# EAGLE board ChargerShieldExpA-Prod (EAGLE 6.5.0)
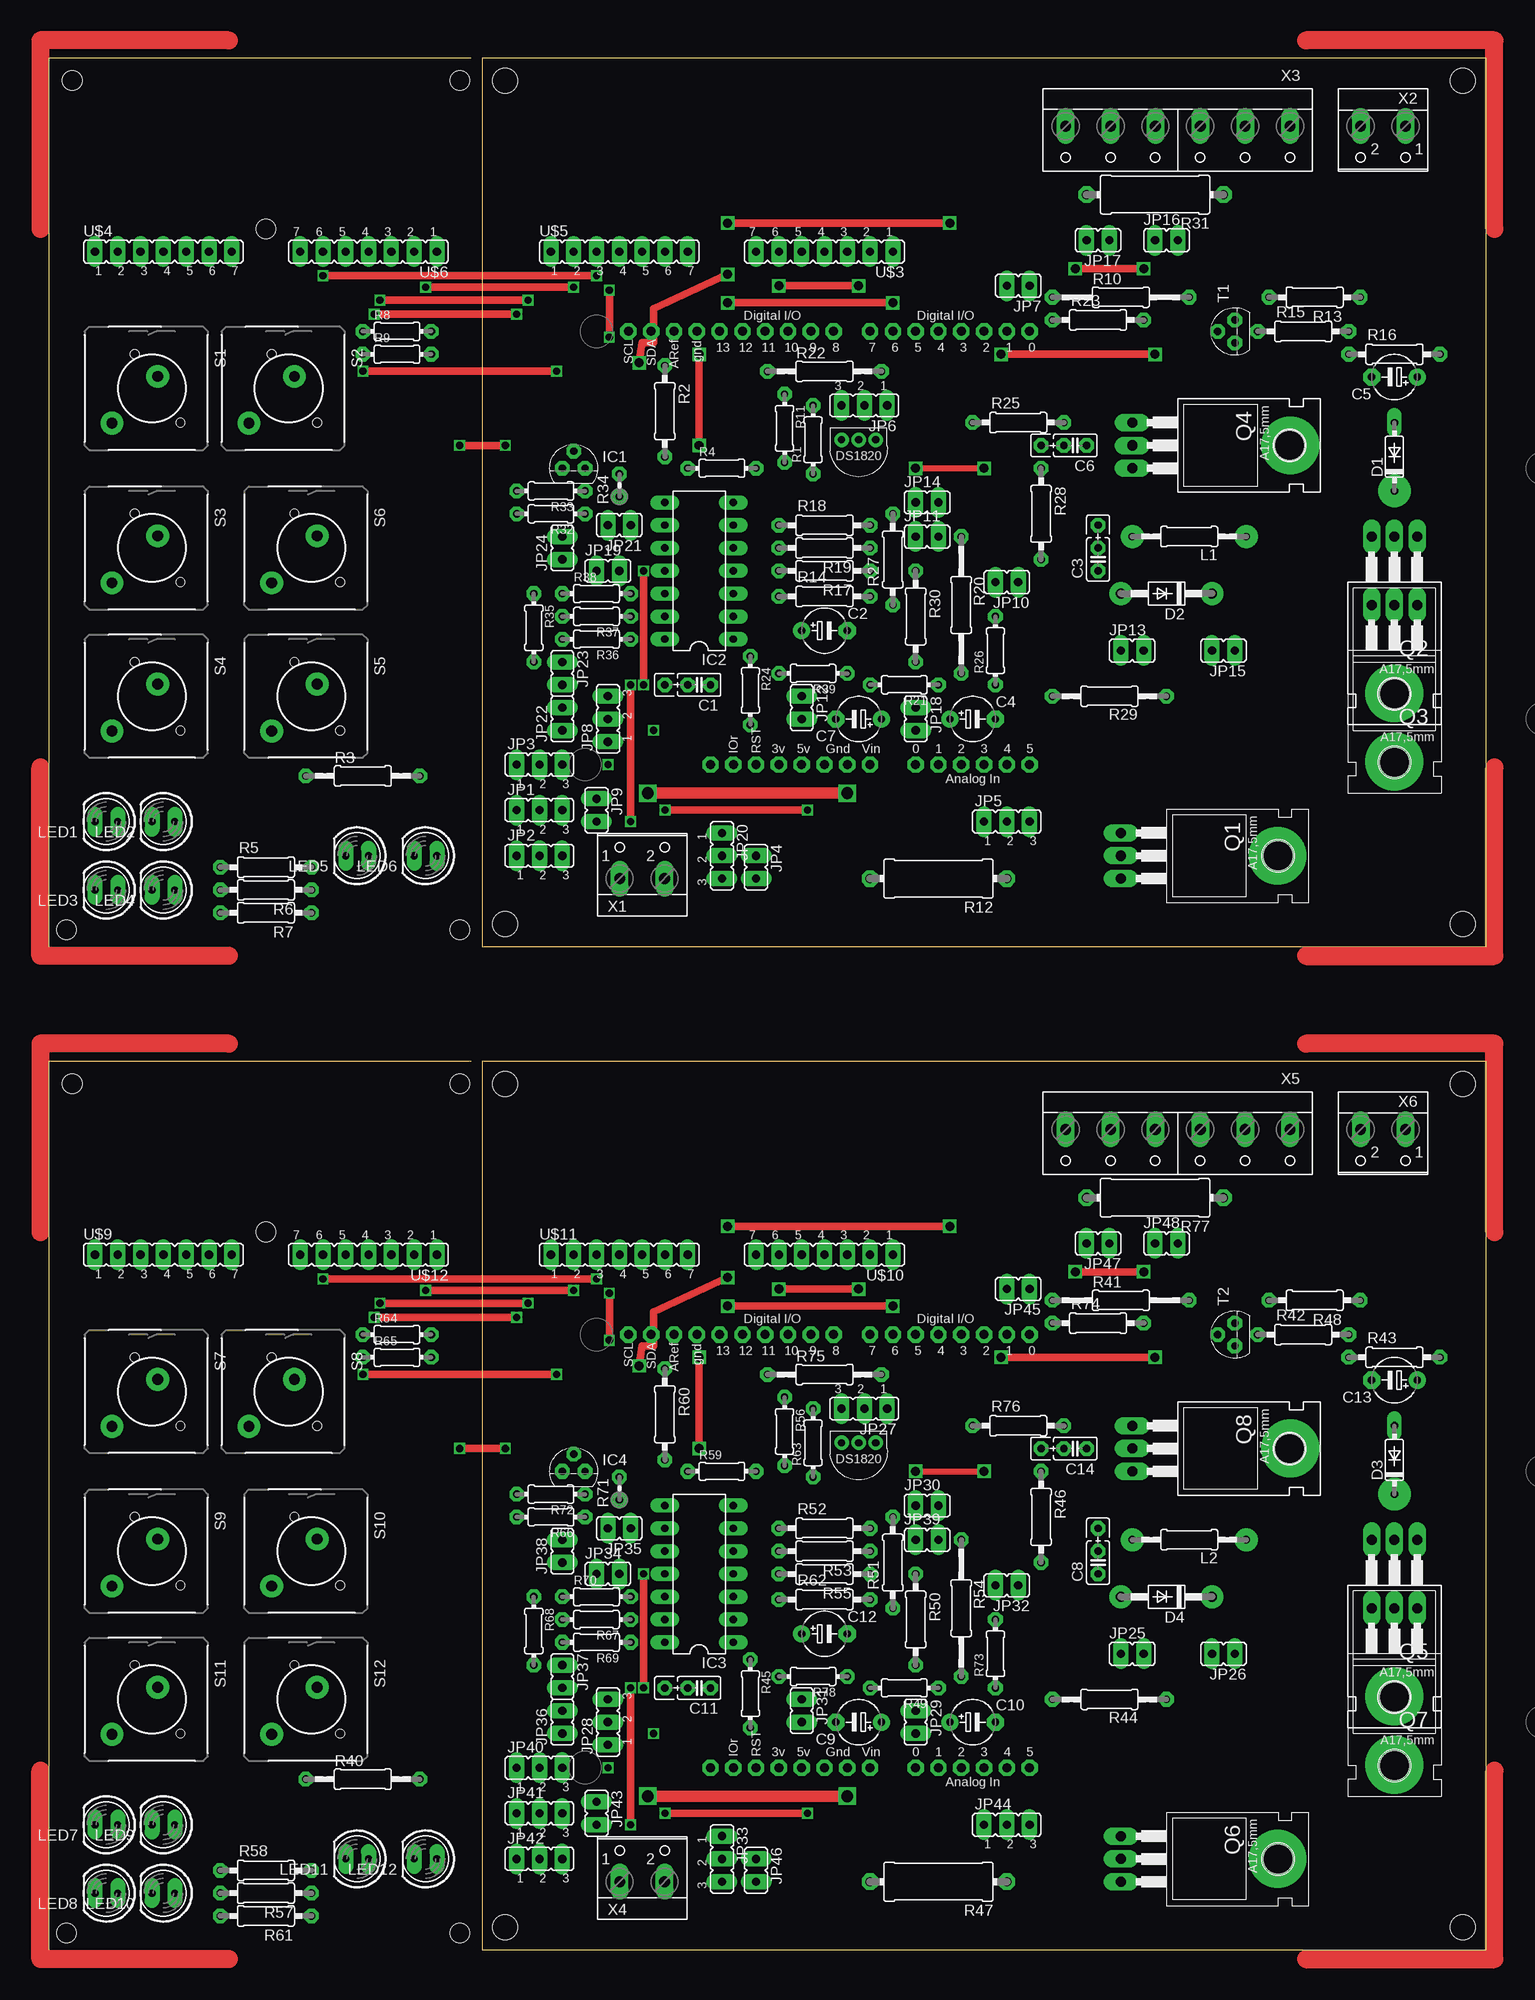
[diagram p0: board, top side]
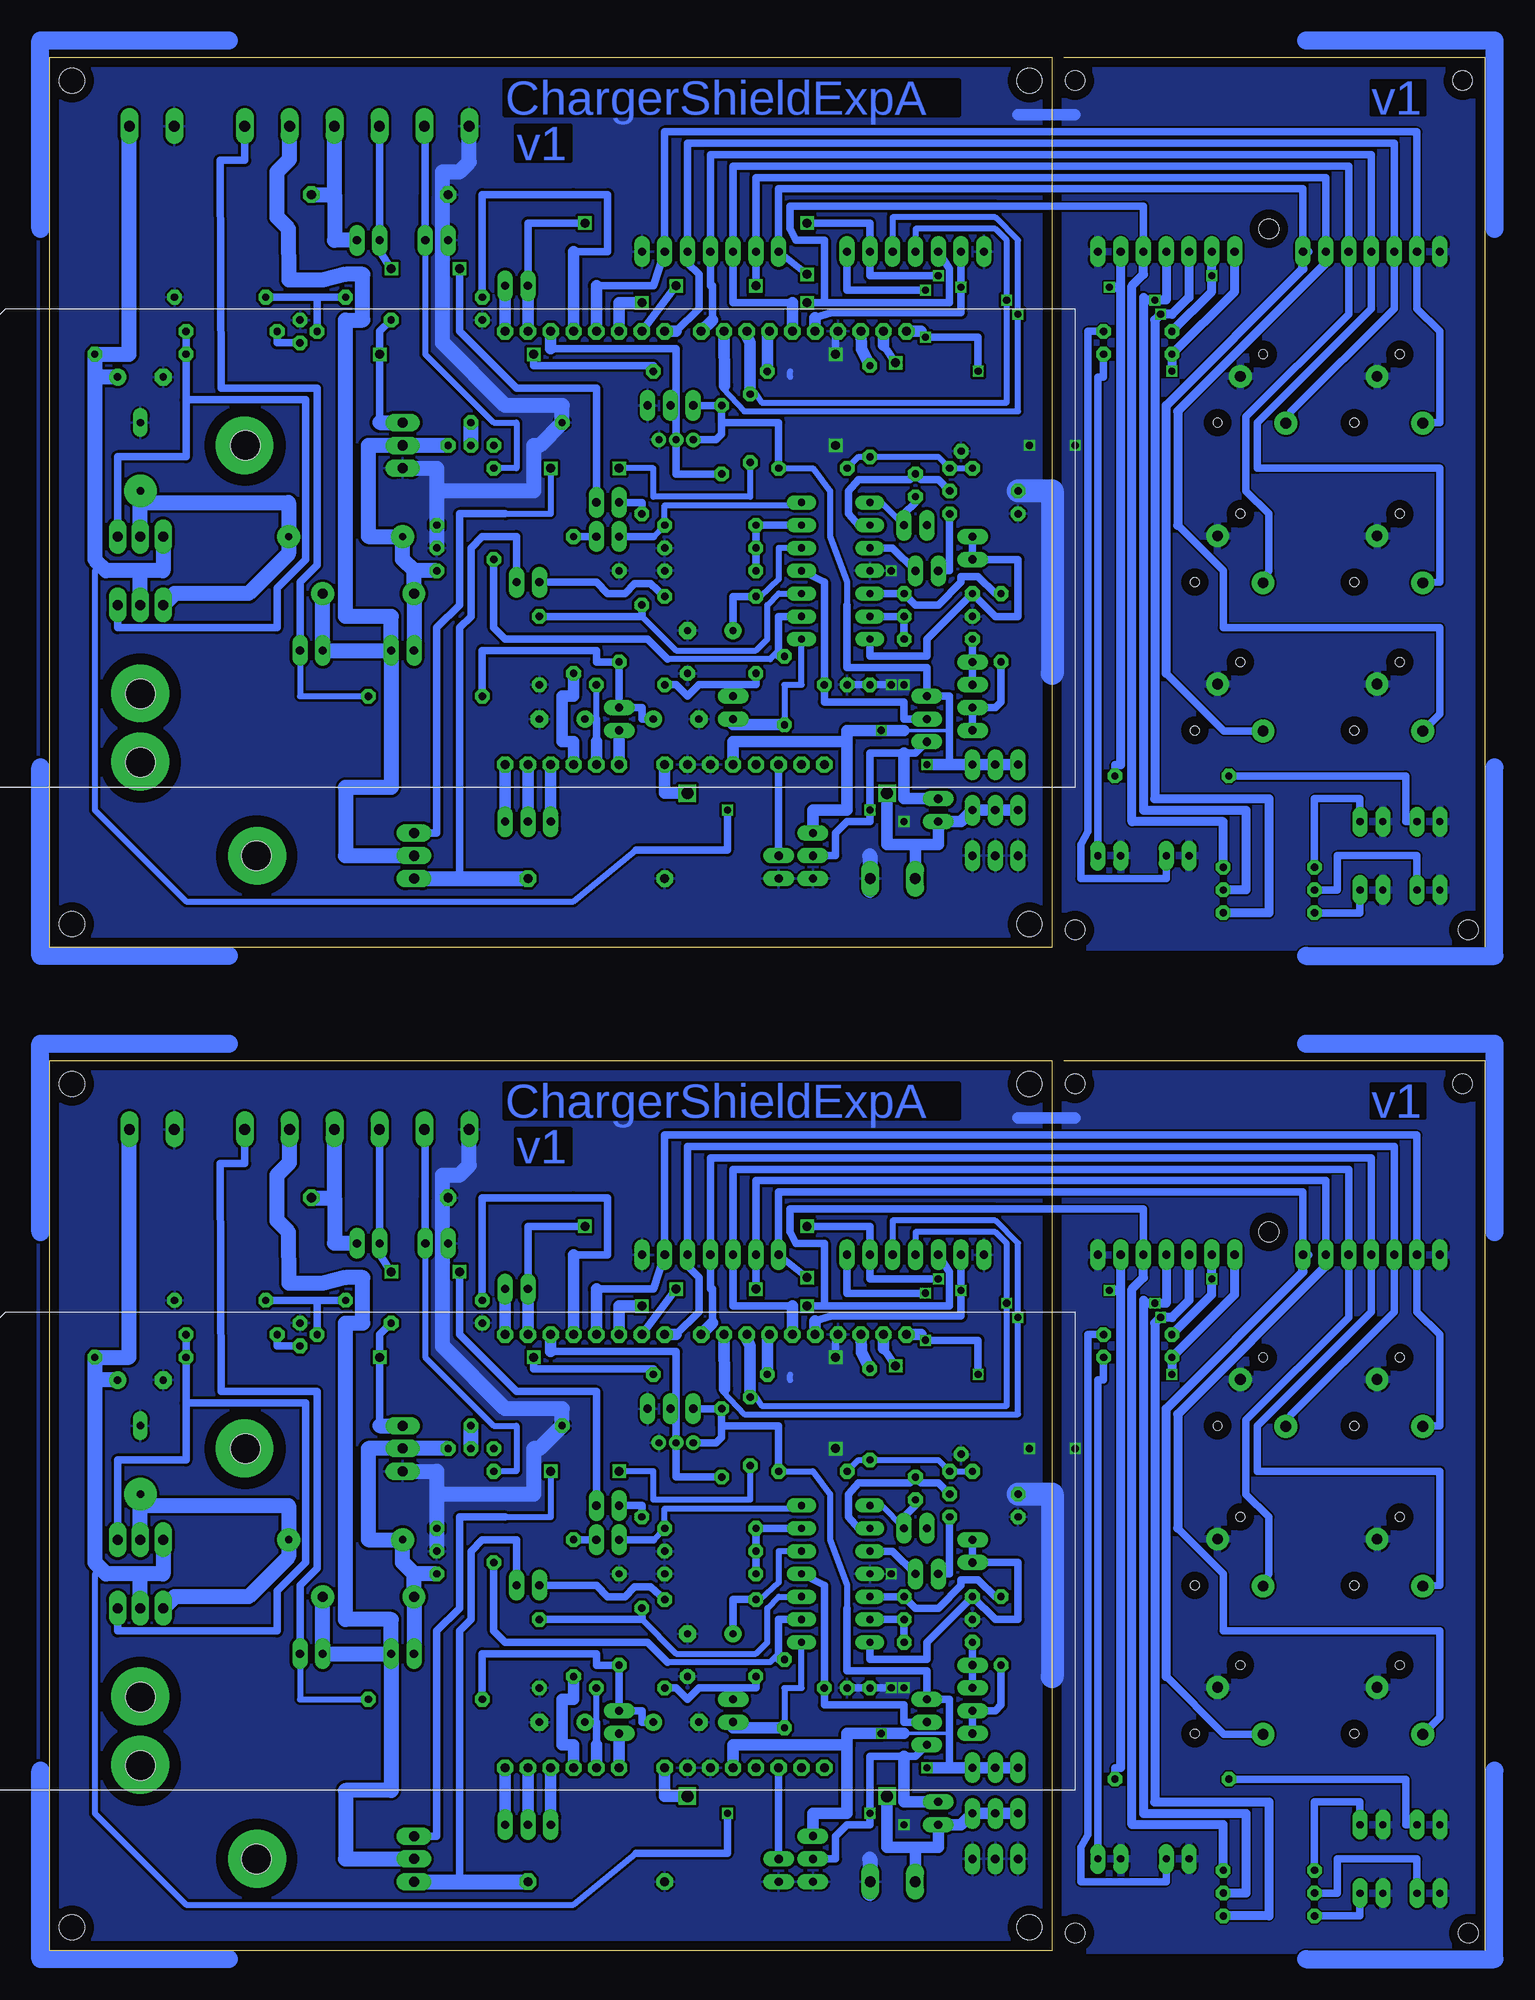
[diagram p1: board, bottom side, seen from below]

Size 160.02 x 210.82 mm. Coordinates in mm from the lower left corner, seen from the top.
Outline: 0,111.76 0,210.82 46.99,210.82
Outline: 0,0 0,99.06 46.99,99.06
Outline: 48.26,210.82 160.02,210.82 160.02,111.76 48.26,111.76 48.26,210.82
Outline: 48.26,99.06 160.02,99.06 160.02,0 48.26,0 48.26,99.06
Copper layers (1*16): Top 0.035mm / dielectric 1.5mm / Bottom 0.035mm
Design rules "charger": minimum track width 26mil, minimum drill 24mil, track to track 8mil, track to pad 8mil, pad to pad 8mil, via to via 8mil, smd to smd 8mil, copper to edge 40mil, drill to drill 8mil, minimum pad ring 16mil, minimum via ring 8mil, stop-mask expansion 4mil, vias tented up to drill 0mil, thermal gap 10mil
Holes 2.8 mm at 50.8,114.3 50.8,208.28 157.48,114.3 157.48,208.28 50.8,2.54 50.8,96.52 157.48,2.54 157.48,96.52
Holes 2.2 mm at 2.54,208.28 45.72,208.28 1.9,113.67 45.72,113.67 24.13,191.77 2.54,96.52 45.72,96.52 1.9,1.91 45.72,1.91 24.13,80.01

## Footprints (pad centres in the part's own frame; a part is rotated, then mirrored left to right if it is on the bottom)
C025_050-025X075 = drill 0.813 octagon: 1 -1.27,0; 2 1.27,0; 3 3.81,0
E5-5 = drill 0.813 pad 1.905: + -2.54,0 | drill 0.813 pad 1.905 octagon: - 2.54,0
DO35-7 = drill 0.813 long: A 3.81,0; C -3.81,0
DO41-10 = drill 1.118: A 5.08,0; C -5.08,0
TO92 = drill 0.813 octagon: 1 1.27,-1.27; 2 0,0.635; 3 -1.27,-1.27
DIL14 = drill 0.813 long: 1 -7.62,-3.81; 2 -5.08,-3.81; 3 -2.54,-3.81; 4 0,-3.81; 5 2.54,-3.81; 6 5.08,-3.81; 7 7.62,-3.81; 8 7.62,3.81; 9 5.08,3.81; 10 2.54,3.81; 11 0,3.81; 12 -2.54,3.81; 13 -5.08,3.81; 14 -7.62,3.81
JP2 = drill 0.914 long: 1 -2.54,0; 2 0,0; 3 2.54,0
JP1 = drill 0.914 long: 1 0,-1.27; 2 0,1.27
0207/12 = drill 0.813 octagon: 1 -6.35,0; 2 6.35,0
LED5MM_BIG = drill 0.8 pad 1.676 long: A -1.27,0; K 1.27,0
TO220 = drill 1.118 long: 1 -2.54,-6.35; 2 0,-6.35; 3 2.54,-6.35 | hole 3.302: 0,11.176
TO220BH = drill 1.118 long: D 0,-6.35; G -2.54,-6.35; S 2.54,-6.35 | hole 3.302: 0,11.176
0204/7 = drill 0.813 octagon: 1 -3.81,0; 2 3.81,0
0207/10 = drill 0.813 octagon: 1 -5.08,0; 2 5.08,0
0207/15 = drill 0.813 octagon: 1 -7.62,0; 2 7.62,0
0414/15 = drill 1.016 octagon: 1 -7.62,0; 2 7.62,0
0204V = drill 0.813 octagon: 1 -1.27,0; 2 1.27,0
TACTILE-PTH-UMSE = drill 1.2 pad 2.54: 1 -1.346,0.635; 3 3.886,-4.445 | hole 1: 3.81,3.175; -3.81,-1.905
TO92' = drill 0.813 octagon: 1 1.27,0; 2 0,1.905; 3 -1.27,0
DS1820 = drill 0.8: DQ 2.54,-1.27; GND 0.635,-1.27; VDD 4.445,-1.27
ARDUINOR3-BPLACE-LONG = drill 1 pad 1.676 octagon: 3V 35.56,2.54; 5V 38.1,2.54; A0 50.8,2.54; A1 53.34,2.54; A2 55.88,2.54; A3 58.42,2.54; A4 60.96,2.54; A5 63.5,2.54; AREF 23.876,50.8; D0 63.5,50.8; D1 60.96,50.8; D2 58.42,50.8; D3 55.88,50.8; D4 53.34,50.8; D5 50.8,50.8; D6 48.26,50.8; D7 45.72,50.8; D8 41.656,50.8; D9 39.116,50.8; D10 36.576,50.8; D11 34.036,50.8; D12 31.496,50.8; D13 28.956,50.8; GND 26.416,50.8; GND1 43.18,2.54; GND2 40.64,2.54; IOREF 30.48,2.54; RESERVED 27.94,2.54; RESET 33.02,2.54; SCL 18.796,50.8; SDA 21.336,50.8; VIN 45.72,2.54
JP7 = drill 0.914 long: 1 -7.62,0; 2 -5.08,0; 3 -2.54,0; 4 0,0; 5 2.54,0; 6 5.08,0; 7 7.62,0
W237-102 = drill 1.194 long: 1 -2.5,-1.27; 2 2.5,-1.27
W237-6 = drill 1.194 long: 1 -12.5,-1.27; 2 -7.5,-1.27; 3 -2.5,-1.27; 4 2.5,-1.27; 5 7.5,-1.27; 6 12.5,-1.27

## Placement (x,y rotation side)
C1  100n  [C025_050-025X075]  72.39,140.97 180 top
C2  3µ3  [E5-5]  86.36,147 0 top
C3  15n/60V  [C025_050-025X075]  116.84,154.94 90 top
C4  3µ3  [E5-5]  102.87,137.16 0 top
C5  10µ  [E5-5]  149.86,175.26 180 top
C6  100n  [C025_050-025X075]  114.3,167.64 180 top
C7  10µ  [E5-5]  90.17,137.16 180 top
C8  15n/60V  [C025_050-025X075]  116.84,43.18 90 top
C9  10µ  [E5-5]  90.17,25.4 180 top
C10  3µ3  [E5-5]  102.87,25.4 0 top
C11  100n  [C025_050-025X075]  72.39,29.21 180 top
C12  3µ3  [E5-5]  86.36,35.24 0 top
C13  10µ  [E5-5]  149.86,63.5 180 top
C14  100n  [C025_050-025X075]  114.3,55.88 180 top
D1  [DO35-7]  149.86,166.37 90 top
D2  1N4004  [DO41-10]  124.46,151.13 180 top
D3  [DO35-7]  149.86,54.61 90 top
D4  1N4004  [DO41-10]  124.46,39.37 180 top
E$1  [A4-35SCP]  -12.7,-53.34 0 top  (outside the outline)
IC1  TL431  [TO92]  58.42,166.37 0 top
IC2  LM324N  [DIL14]  72.39,153.67 90 top
IC3  LM324N  [DIL14]  72.39,41.91 90 top
IC4  TL431  [TO92]  58.42,54.61 0 top
JP1  [JP2]  54.61,127 0 top
JP2  [JP2]  54.61,121.92 0 top
JP3  [JP2]  54.61,132.08 0 top
JP4  [JP1]  78.74,120.65 180 top
JP5  [JP2]  106.68,125.73 0 top
JP6  [JP2]  90.81,172.08 180 top
JP7  [JP1]  107.95,185.42 90 top
JP8  [JP2]  62.23,137.16 90 top
JP9  [JP1]  60.96,127 180 top
JP10  [JP1]  106.68,152.4 90 top
JP11  [JP1]  97.79,157.48 270 top
JP12  [JP1]  83.82,138.43 180 top
JP13  [JP1]  120.65,144.78 270 top
JP14  [JP1]  97.79,161.29 270 top
JP15  [JP1]  130.81,144.78 90 top
JP16  [JP1]  124.46,190.5 270 top
JP17  [JP1]  116.84,190.5 90 top
JP18  [JP1]  96.52,137.16 180 top
JP19  [JP1]  62.23,153.67 270 top
JP20  [JP2]  74.93,121.92 270 top
JP21  [JP1]  63.5,158.75 90 top
JP22  [JP1]  57.15,137.16 0 top
JP23  [JP1]  57.15,142.24 180 top
JP24  [JP1]  57.15,156.21 0 top
JP25  [JP1]  120.65,33.02 270 top
JP26  [JP1]  130.81,33.02 90 top
JP27  [JP2]  90.81,60.33 180 top
JP28  [JP2]  62.23,25.4 90 top
JP29  [JP1]  96.52,25.4 180 top
JP30  [JP1]  97.79,49.53 270 top
JP31  [JP1]  83.82,26.67 180 top
JP32  [JP1]  106.68,40.64 90 top
JP33  [JP2]  74.93,10.16 270 top
JP34  [JP1]  62.23,41.91 270 top
JP35  [JP1]  63.5,46.99 90 top
JP36  [JP1]  57.15,25.4 0 top
JP37  [JP1]  57.15,30.48 180 top
JP38  [JP1]  57.15,44.45 0 top
JP39  [JP1]  97.79,45.72 270 top
JP40  [JP2]  54.61,20.32 0 top
JP41  [JP2]  54.61,15.24 0 top
JP42  [JP2]  54.61,10.16 0 top
JP43  [JP1]  60.96,15.24 180 top
JP44  [JP2]  106.68,13.97 0 top
JP45  [JP1]  107.95,73.66 90 top
JP46  [JP1]  78.74,8.89 180 top
JP47  [JP1]  116.84,78.74 90 top
JP48  [JP1]  124.46,78.74 270 top
L1  100µ  [0207/12]  127,157.48 180 top
L2  100µ  [0207/12]  127,45.72 180 top
LED1  CHRG1  [LED5MM_BIG]  6.35,125.73 180 top
LED2  CHRG2  [LED5MM_BIG]  12.7,125.73 180 top
LED3  [LED5MM_BIG]  6.35,118.11 180 top
LED4  [LED5MM_BIG]  12.7,118.11 180 top
LED5  [LED5MM_BIG]  34.29,121.92 180 top
LED6  [LED5MM_BIG]  41.91,121.92 180 top
LED7  CHRG1  [LED5MM_BIG]  6.35,13.97 180 top
LED8  [LED5MM_BIG]  6.35,6.35 180 top
LED9  CHRG2  [LED5MM_BIG]  12.7,13.97 180 top
LED10  [LED5MM_BIG]  12.7,6.35 180 top
LED11  [LED5MM_BIG]  34.29,10.16 180 top
LED12  [LED5MM_BIG]  41.91,10.16 180 top
Q1  BUZ11  [TO220]  125.73,121.92 270 top
Q2  BD648  [TO220]  149.86,151.13 180 top
Q3  BUZ171  [TO220]  149.86,143.51 180 top
Q4  IRFZ48Z  [TO220BH]  127,167.64 270 top
Q5  BD648  [TO220]  149.86,39.37 180 top
Q6  BUZ11  [TO220]  125.73,10.16 270 top
Q7  BUZ171  [TO220]  149.86,31.75 180 top
Q8  IRFZ48Z  [TO220BH]  127,55.88 270 top
R1  4k7  [0204/7]  85.09,168.27 90 top
R2  4k7  [0207/10]  68.58,171.45 270 top
R3  470  [0207/12]  34.92,130.81 0 top
R4  200  [0204/7]  74.93,165.1 0 top
R5  470  [0207/10]  24.13,120.65 0 top
R6  470  [0207/10]  24.13,118.11 180 top
R7  470  [0207/10]  24.13,115.57 180 top
R8  470  [0204/7]  38.73,180.34 0 top
R9  470  [0204/7]  38.73,177.8 0 top
R10  2k2  [0207/15]  119.38,184.15 0 top
R11  1k  [0204/7]  81.92,169.55 270 top
R12  1R666  [0414/15]  99.06,119.38 180 top
R13  100k  [0207/10]  140.97,184.15 180 top
R14  0  [0207/10]  86.36,150.81 0 top
R15  1k  [0207/10]  139.7,180.34 0 top
R16  1k  [0207/10]  149.86,177.8 0 top
R17  12k  [0207/10]  86.36,153.67 180 top
R18  100k  [0207/10]  86.36,158.75 0 top
R19  33k  [0207/10]  86.36,156.21 180 top
R20  1k  [0207/15]  101.6,149.86 270 top
R21  1k  [0204/7]  95.25,140.97 180 top
R22  200  [0207/12]  86.36,175.89 0 top
R23  1M  [0207/10]  116.84,181.61 0 top
R24  100k  [0204/7]  78.11,140.33 270 top
R25  1k  [0207/10]  107.95,170.18 0 top
R26  100k  [0204/7]  105.41,144.78 90 top
R27  10k  [0207/10]  93.98,154.94 90 top
R28  10k  [0207/10]  110.49,160.02 270 top
R29  1k  [0207/12]  118.11,139.7 180 top
R30  100k  [0207/10]  96.52,148.59 270 top
R31  1R666  [0414/15]  123.19,195.58 180 top
R32  0  [0204/7]  55.88,160.02 180 top
R33  0  [0204/7]  55.88,162.56 180 top
R34  0  [0204V]  63.5,163.19 90 top
R35  0  [0204/7]  53.98,147.32 270 top
R36  0  [0204/7]  60.96,146.05 180 top
R37  0  [0204/7]  60.96,148.59 180 top
R38  0  [0204/7]  60.96,151.13 0 top
R39  *  [0204/7]  85.09,142.24 180 top
R40  470  [0207/12]  34.92,19.05 0 top
R41  2k2  [0207/15]  119.38,72.39 0 top
R42  1k  [0207/10]  139.7,68.58 0 top
R43  1k  [0207/10]  149.86,66.04 0 top
R44  1k  [0207/12]  118.11,27.94 180 top
R45  100k  [0204/7]  78.11,28.58 270 top
R46  10k  [0207/10]  110.49,48.26 270 top
R47  1R666  [0414/15]  99.06,7.62 180 top
R48  100k  [0207/10]  140.97,72.39 180 top
R49  1k  [0204/7]  95.25,29.21 180 top
R50  100k  [0207/10]  96.52,36.83 270 top
R51  10k  [0207/10]  93.98,43.18 90 top
R52  100k  [0207/10]  86.36,46.99 0 top
R53  33k  [0207/10]  86.36,44.45 180 top
R54  1k  [0207/15]  101.6,38.1 270 top
R55  12k  [0207/10]  86.36,41.91 180 top
R56  1k  [0204/7]  81.92,57.78 270 top
R57  470  [0207/10]  24.13,6.35 180 top
R58  470  [0207/10]  24.13,8.89 0 top
R59  200  [0204/7]  74.93,53.34 0 top
R60  4k7  [0207/10]  68.58,59.69 270 top
R61  470  [0207/10]  24.13,3.81 180 top
R62  0  [0207/10]  86.36,39.05 0 top
R63  4k7  [0204/7]  85.09,56.52 90 top
R64  470  [0204/7]  38.73,68.58 0 top
R65  470  [0204/7]  38.73,66.04 0 top
R66  0  [0204/7]  55.88,48.26 180 top
R67  0  [0204/7]  60.96,36.83 180 top
R68  0  [0204/7]  53.98,35.56 270 top
R69  0  [0204/7]  60.96,34.29 180 top
R70  0  [0204/7]  60.96,39.37 0 top
R71  0  [0204V]  63.5,51.44 90 top
R72  0  [0204/7]  55.88,50.8 180 top
R73  100k  [0204/7]  105.41,33.02 90 top
R74  1M  [0207/10]  116.84,69.85 0 top
R75  200  [0207/12]  86.36,64.14 0 top
R76  1k  [0207/10]  107.95,58.42 0 top
R77  1R666  [0414/15]  123.19,83.82 180 top
R78  *  [0204/7]  85.09,30.48 180 top
S1  Down  [TACTILE-PTH-UMSE]  11.43,173.99 270 top
S2  Up  [TACTILE-PTH-UMSE]  26.67,173.99 270 top
S3  Start  [TACTILE-PTH-UMSE]  11.43,156.21 270 top
S4  A  [TACTILE-PTH-UMSE]  11.43,139.7 270 top
S5  B  [TACTILE-PTH-UMSE]  29.21,139.7 270 top
S6  Discharge  [TACTILE-PTH-UMSE]  29.21,156.21 270 top
S7  Down  [TACTILE-PTH-UMSE]  11.43,62.23 270 top
S8  Up  [TACTILE-PTH-UMSE]  26.67,62.23 270 top
S9  Start  [TACTILE-PTH-UMSE]  11.43,44.45 270 top
S10  Discharge  [TACTILE-PTH-UMSE]  29.21,44.45 270 top
S11  A  [TACTILE-PTH-UMSE]  11.43,27.94 270 top
S12  B  [TACTILE-PTH-UMSE]  29.21,27.94 270 top
T1  BC548  [TO92']  132.08,180.34 90 top
T2  BC548  [TO92']  132.08,68.58 90 top
U$1  DS1820TO92  [DS1820]  92.71,167 180 top
U$2  ARDUINOR3BPLACE-LONG  [ARDUINOR3-BPLACE-LONG]  45.72,129.54 0 top
U$3  JP7E  [JP7]  86.36,189.23 180 top
U$4  JP7E  [JP7]  12.7,189.23 0 top
U$5  JP7E  [JP7]  63.5,189.23 0 top
U$6  JP7E  [JP7]  35.56,189.23 180 top
U$7  ARDUINOR3BPLACE-LONG  [ARDUINOR3-BPLACE-LONG]  45.72,17.78 0 top
U$8  DS1820TO92  [DS1820]  92.71,55.25 180 top
U$9  JP7E  [JP7]  12.7,77.47 0 top
U$10  JP7E  [JP7]  86.36,77.47 180 top
U$11  JP7E  [JP7]  63.5,77.47 0 top
U$12  JP7E  [JP7]  35.56,77.47 180 top
X1  +Vin  [W237-102]  66.04,120.65 0 top
X2  VCC  [W237-102]  148.59,201.93 180 top
X3  Battery  [W237-6]  125.73,201.93 180 top
X4  +Vin  [W237-102]  66.04,8.89 0 top
X5  Battery  [W237-6]  125.73,90.17 180 top
X6  VCC  [W237-102]  148.59,90.17 180 top

## Library data of the parts
C1-C14 L1 L2 R1-R78 = rcl
D1-D4 = diode
E$1 = frames
IC1 IC4 = AWJLEagleLib
IC2 IC3 = linear
JP1-JP48 LED1-LED12 S1-S12 U$3-U$6 U$9-U$12 = bigger
Q1 Q3 Q6 Q7 = transistor-fet
Q2 Q5 = transistor-pnp
Q4 Q8 = transistor-power
T1 T2 = transistor
U$1 U$8 = Ava
U$2 U$7 = arduino-long
X1 X2 X4 X6 = con-wago-500; MPN: 237-102; OC_FARNELL: unknown; OC_NEWARK: 70K9898
X3 X5 = con-wago-500; OC_FARNELL: unknown; OC_NEWARK: unknown

## Nets
3V: U$2.3V
3V1: U$7.3V
+5V: JP3.1 JP3.2 JP3.3 JP6.3 JP8.3 JP20.1 R1.2 R4.2 U$1.VDD U$2.5V
+5V1: JP27.3 JP28.3 JP33.1 JP40.1 JP40.2 JP40.3 R59.2 R63.2 U$7.5V U$8.VDD
GND: C1.2 C2.- C3.2 C4.- C5.- C7.- D1.A IC1.2 IC2.11 JP2.1 JP2.2 JP2.3 JP4.2 JP6.1 JP17.2 JP20.3 LED1.K LED2.K LED3.K LED4.K LED5.K LED6.K Q4.S R12.2 R13.1 R17.1 R19.1 R23.1 R25.1 R26.1 R30.1 R31.2 R32.2 R33.2 R37.2 R39.1 S1.1 S2.1 S3.1 S4.1 S5.1 S6.1 T1.1 U$1.GND U$2.GND U$2.GND1 U$2.GND2 U$3.1 U$4.1 U$5.1 U$6.1 X1.2 X2.2 X3.6
GND1: C8.2 C9.- C10.- C11.2 C12.- C13.- D3.A IC3.11 IC4.2 JP27.1 JP33.3 JP42.1 JP42.2 JP42.3 JP46.2 JP47.2 LED7.K LED8.K LED9.K LED10.K LED11.K LED12.K Q8.S R47.2 R48.1 R50.1 R53.1 R55.1 R66.2 R67.2 R72.2 R73.1 R74.1 R76.1 R77.2 R78.1 S7.1 S8.1 S9.1 S10.1 S11.1 S12.1 T2.1 U$7.GND U$7.GND1 U$7.GND2 U$8.GND U$9.1 U$10.1 U$11.1 U$12.1 X4.2 X5.6 X6.2
I1_SENSE+: JP16.2 R31.1 X3.3
I1_SENSE+1: JP48.2 R77.1 X5.3
I1_SENSE-: JP17.1 R28.1 X3.5
I1_SENSE-1: JP47.1 R46.1 X5.5
I_BATT1: C4.+ R21.1 U$2.A1
I_BATT2: JP5.2 U$2.A4
I_BATT3: C10.+ R49.1 U$7.A1
I_BATT4: JP44.2 U$7.A4
I_DISC1: R20.2 U$2.A2
I_DISC2: JP5.3 U$2.A5
I_DISC3: R54.2 U$7.A2
I_DISC4: JP44.3 U$7.A5
N$1: R3.2 U$2.D13 U$5.2 U$6.2
N$2: LED1.A R3.1
N$3: C7.+ JP18.1 R29.2 R30.2
N$4: C1.1 IC2.4 JP8.2
N$5: R10.2 R13.2 T1.2
N$6: R15.1 T1.3
N$7: Q2.1 Q3.1 R15.2 R16.1
N$8: JP15.1 R29.1 X3.1
N$9: D1.C L1.1 Q2.2 Q3.3
N$10: C3.1 C6.1 D2.A JP13.1 L1.2 Q4.D
N$11: IC2.1 JP12.2 R24.2
N$12: JP6.2 R1.1 U$1.DQ U$2.D2
N$13: D2.C JP13.2 JP15.2 Q1.2 X3.2
N$14: IC2.2 R24.1 R28.2
N$15: IC2.3 R26.2 R27.1
N$16: IC2.6 R17.2 R18.1 R19.2
N$17: IC2.7 JP11.1 R18.2
N$18: Q1.1 R11.2
N$19: R5.2 U$2.D5 U$5.3 U$6.3
N$20: LED3.A R6.2
N$21: LED4.A R7.2
N$22: JP14.1 R27.2
N$23: S6.3 U$2.D12 U$3.5 U$4.5
N$24: LED2.A R5.1
N$25: JP10.1 Q1.3 R12.1
N$26: S1.3 U$2.D4 U$3.2 U$4.2
N$27: IC1.1 IC1.3 R2.2 R4.1
N$28: R2.1 U$2.AREF
N$29: C2.+ IC2.5 R14.1
N$30: S2.3 U$2.D7 U$3.3 U$4.3
N$31: S3.3 U$2.D8 U$3.4 U$4.4
N$32: JP12.1 R21.2 R39.2
N$33: JP10.2 R14.2
N$34: IC2.8 JP21.1 R34.1
N$35: JP11.2 R20.1
N$36: IC2.13 R36.1 R37.1
N$37: S4.3 U$2.D6 U$3.6 U$4.6
N$38: S5.3 U$2.SDA U$3.7 U$4.7
N$39: LED5.A R8.2
N$40: LED6.A R9.2
N$41: R9.1 U$2.SCL U$5.7 U$6.7
N$42: JP7.2 R8.1 U$2.D1 U$5.6 U$6.6
N$43: IC2.10 JP19.2
N$44: JP19.1 R32.1
N$45: IC2.12 R35.1 R38.2
N$46: JP22.1 JP22.2 R35.2
N$47: JP23.1 JP23.2 R36.2
N$48: IC2.14 JP24.1 JP24.2 R38.1
N$49: IC2.9 R33.1 R34.2
N$50: C6.2 R25.2
N$51: Q4.G R22.2 R23.2
N$52: JP7.1 U$2.D0
N$53: JP4.1 U$2.RESET
N$54: JP14.2 JP16.1 X3.4
N$64: R40.2 U$7.D13 U$11.2 U$12.2
N$65: LED7.A R40.1
N$66: R41.2 R48.2 T2.2
N$67: R42.1 T2.3
N$68: Q5.1 Q7.1 R42.2 R43.1
N$69: D3.C L2.1 Q5.2 Q7.3
N$70: C8.1 C14.1 D4.A JP25.1 L2.2 Q8.D
N$71: IC3.1 JP31.2 R45.2
N$72: IC3.2 R45.1 R46.2
N$73: D4.C JP25.2 JP26.2 Q6.2 X5.2
N$74: JP26.1 R44.1 X5.1
N$75: IC3.3 R51.1 R73.2
N$76: IC3.6 R52.1 R53.2 R55.2
N$77: IC3.7 JP39.1 R52.2
N$78: LED8.A R57.2
N$79: S10.3 U$7.D12 U$9.5 U$10.5
N$80: LED9.A R58.1
N$81: R58.2 U$7.D5 U$11.3 U$12.3
N$82: Q6.1 R56.2
N$83: IC4.1 IC4.3 R59.1 R60.2
N$84: R60.1 U$7.AREF
N$85: LED10.A R61.2
N$86: JP32.1 Q6.3 R47.1
N$87: C12.+ IC3.5 R62.1
N$88: JP27.2 R63.1 U$7.D2 U$8.DQ
N$89: S7.3 U$7.D4 U$9.2 U$10.2
N$90: S8.3 U$7.D7 U$9.3 U$10.3
N$91: S9.3 U$7.D8 U$9.4 U$10.4
N$92: S11.3 U$7.D6 U$9.6 U$10.6
N$93: S12.3 U$7.SDA U$9.7 U$10.7
N$94: LED11.A R64.2
N$95: LED12.A R65.2
N$96: R65.1 U$7.SCL U$11.7 U$12.7
N$97: C11.1 IC3.4 JP28.2
N$98: C9.+ JP29.1 R44.2 R50.2
N$99: JP30.1 R51.2
N$100: JP31.1 R49.2 R78.2
N$101: JP32.2 R62.2
N$102: IC3.8 JP35.1 R71.1
N$103: IC3.10 JP34.2
N$104: JP34.1 R66.1
N$105: IC3.13 R67.1 R69.1
N$106: IC3.12 R68.1 R70.2
N$107: JP36.1 JP36.2 R68.2
N$108: JP37.1 JP37.2 R69.2
N$109: IC3.14 JP38.1 JP38.2 R70.1
N$110: IC3.9 R71.2 R72.1
N$111: JP39.2 R54.1
N$112: Q8.G R74.2 R75.2
N$113: C14.2 R76.2
N$114: JP45.2 R64.1 U$7.D1 U$11.6 U$12.6
N$115: JP45.1 U$7.D0
N$116: JP46.1 U$7.RESET
N$117: JP30.2 JP48.1 X5.4
PWM_CHARGE1: R10.1 U$2.D3
PWM_CHARGE2: R22.1 U$2.D11
PWM_CHARGE3: R41.1 U$7.D3
PWM_CHARGE4: R75.1 U$7.D11
PWM_DISCHARGE1: R6.1 R11.1 U$2.D10 U$5.4 U$6.4
PWM_DISCHARGE2: R7.1 U$2.D9 U$5.5 U$6.5
PWM_DISCHARGE3: R56.1 R57.1 U$7.D10 U$11.4 U$12.4
PWM_DISCHARGE4: R61.1 U$7.D9 U$11.5 U$12.5
U_BATT1: JP18.2 U$2.A0
U_BATT2: JP5.1 U$2.A3
U_BATT3: JP29.2 U$7.A0
U_BATT4: JP44.1 U$7.A3
VCC: C5.+ JP8.1 JP9.1 JP20.2 Q2.3 Q3.2 R16.2 X2.1
VCC1: C13.+ JP28.1 JP33.2 JP43.1 Q5.3 Q7.2 R43.2 X6.1
VIN: JP1.1 JP1.2 JP1.3 JP9.2 U$2.VIN X1.1
VIN1: JP41.1 JP41.2 JP41.3 JP43.2 U$7.VIN X4.1

## Tracks (layer width: path | path; a pad name or v marks a point on that pad's centre or on a via)
+5V  (via drill 0.8)
  Bottom 0.406: 59.69,135.89 64.77,135.89
  Bottom 0.66: R4.2 74.93,165.1 73.03,162.56 73.03,157.48 71.12,152.4 71.12,149.86
  Bottom 0.813: 71.12,149.86 71.12,142.88 62.23,142.88 JP8.3 59.69,139.7 59.69,135.89 59.69,132.08 | R4.2 78.74,170.18 85.09,170.18 R1.2 | R1.2 85.09,168.91 85.73,168.27 U$1.VDD | R1.2 JP6.3
  Bottom 1.27: 71.12,134.62 83.82,134.62 U$2.5V | 71.12,134.62 71.12,135.89 v67.31,135.89 64.77,135.89 | v62.23,132.08 59.69,132.08 JP3.3 JP3.2 JP3.1 | JP20.1 74.93,127 71.12,127 71.12,134.62
+5V1  (via drill 0.8)
  Bottom 0.406: 59.69,24.13 64.77,24.13
  Bottom 0.66: R59.2 74.93,53.34 73.03,50.8 73.03,45.72 71.12,40.64 71.12,38.1
  Bottom 0.813: 71.12,38.1 71.12,31.12 62.23,31.12 JP28.3 59.69,27.94 59.69,24.13 59.69,20.32 | R59.2 78.74,58.42 85.09,58.42 R63.2 | R63.2 85.09,57.15 85.73,56.52 U$8.VDD | R63.2 JP27.3
  Bottom 1.27: 71.12,22.86 83.82,22.86 U$7.5V | 71.12,22.86 71.12,24.13 v67.31,24.13 64.77,24.13 | v62.23,20.32 59.69,20.32 JP40.3 JP40.2 JP40.1 | JP33.1 74.93,15.24 71.12,15.24 71.12,22.86
GND  (via drill 0.8, 1)
  Top 0.813: v72.39,177.8 v72.39,167.64 | v66.2,140.97 v66.2,153.67 | v64.77,140.97 v64.77,125.73 | v45.72,167.64 v50.8,167.64
  Bottom 0.66: 77.47,175.26 77.47,175.87
  Bottom 0.813: U$2.GND 72.39,180.34 v72.39,177.8 | v66.2,140.97 C1.2
  Bottom 1.27: 45.72,204.47 52.07,204.47
  Bottom 1.676: 68.58,121.92 68.58,118.07 X1.2 | Q4.S 116.84,165.1 116.84,162.56 | 116.84,162.56 C3.2 | 116.84,162.56 106.05,162.56 106.05,167.64 105.41,167.64 R25.1 102.87,172.08 109.22,172.08 116.2,179.07 116.2,198.12 114.3,198.12 113.23,199.19 X3.6
  Bottom 2.54: 48.26,142.24 48.26,162.56 R33.2
  pour Bottom (isolate 0.305): 48.26,111.76 48.26,210.82 161.29,210.82 161.29,111.76
  pour Bottom: 48.26,111.76 48.26,210.82 0,210.82 0,111.76
GND1  (via drill 0.8, 1)
  Top 0.813: v72.39,66.04 v72.39,55.88 | v66.2,29.21 v66.2,41.91 | v64.77,29.21 v64.77,13.97 | v45.72,55.88 v50.8,55.88
  Bottom 0.66: 77.47,63.5 77.47,64.11
  Bottom 0.813: U$7.GND 72.39,68.58 v72.39,66.04 | v66.2,29.21 C11.2
  Bottom 1.27: 45.72,92.71 52.07,92.71
  Bottom 1.676: 68.58,10.16 68.58,6.31 X4.2 | Q8.S 116.84,53.34 116.84,50.8 | 116.84,50.8 C8.2 | 116.84,50.8 106.05,50.8 106.05,55.88 105.41,55.88 R76.1 102.87,60.33 109.22,60.33 116.2,67.31 116.2,86.36 114.3,86.36 113.23,87.43 X5.6
  Bottom 2.54: 48.26,30.48 48.26,50.8 R72.2
  pour Bottom (isolate 0.305): 48.26,0 48.26,99.06 161.29,99.06 161.29,0
  pour Bottom: 48.26,0 48.26,99.06 0,99.06 0,0
I1_SENSE+
  Bottom 1.676: R31.1 128.23,195.58 | 128.23,195.58 128.23,190.5 JP16.2 | 128.23,195.58 X3.3
I1_SENSE+1
  Bottom 1.676: R77.1 128.23,83.82 | 128.23,83.82 128.23,78.74 JP48.2 | 128.23,83.82 X5.3
I1_SENSE-
  Bottom 0.66: R28.1 107.95,165.1 107.95,170.18 110.49,170.18 118.11,177.8 JP17.1 | 118.11,203.2 X3.5
  Bottom 0.813: 118.11,203.2 118.11,195.58 JP17.1
I1_SENSE-1
  Bottom 0.66: R46.1 107.95,53.34 107.95,58.42 110.49,58.42 118.11,66.04 JP47.1 | 118.11,91.44 X5.5
  Bottom 0.813: 118.11,91.44 118.11,83.82 JP47.1
I_BATT1
  Bottom 0.66: 99.06,134.62 R21.1
  Bottom 0.813: C4.+ 99.06,137.16 99.06,134.62
  Bottom 1.27: U$2.A1 99.06,134.62
I_BATT2
  Bottom 1.27: U$2.A4 JP5.2
I_BATT3
  Bottom 0.66: 99.06,22.86 R49.1
  Bottom 0.813: C10.+ 99.06,25.4 99.06,22.86
  Bottom 1.27: U$7.A1 99.06,22.86
I_BATT4
  Bottom 1.27: U$7.A4 JP44.2
I_DISC1
  Bottom 1.27: R20.2 101.6,139.7 102.87,139.7 102.87,134.62 101.6,134.62 U$2.A2
I_DISC2
  Bottom 1.27: U$2.A5 JP5.3
I_DISC3
  Bottom 1.27: R54.2 101.6,27.94 102.87,27.94 102.87,22.86 101.6,22.86 U$7.A2
I_DISC4
  Bottom 1.27: U$7.A5 JP44.3
N$1  (via drill 0.8)
  Top 0.813: v41.91,185.26 v58.42,185.26
  Bottom 0.813: 74.68,181.86 72.87,182.4 58.42,182.4 v58.42,185.26 U$5.2 | R3.2 41.28,132.08 40.64,132.08 | 40.8,185.26 40.64,185.42
  Bottom 1: 40.64,132.08 40.64,185.42 | 40.64,185.42 40.8,185.26 | 40.8,185.26 v41.91,185.26 40.8,185.26 | 40.64,185.42 U$6.2
  Bottom 1.27: U$2.D13 74.68,181.86
N$2
  Bottom 0.813: LED1.A 8.89,125.73 8.89,130.81 R3.1
N$3
  Bottom 0.813: C7.+ 93.98,137.16 93.98,138.43 JP18.1 R30.2 99.06,143.51 99.06,144.78 111.76,144.78 R29.2
N$4
  Bottom 0.813: IC2.4 73.66,152.4 C1.1 73.66,139.06 64.77,139.06 64.77,137.16 JP8.2
N$5
  Bottom 0.813: R13.2 130.18,184.15 | T1.2 130.18,184.15 | 130.18,184.15 R10.2
N$6
  Bottom 0.813: R15.1 134.62,179.07 T1.3
N$7
  Bottom 0.813: Q3.1 152.4,147.32 134.62,147.32 134.62,151.76 131.44,154.94 131.44,172.72 144.78,172.72 | 144.78,172.72 R16.1 R15.2 | 144.78,172.72 144.78,166.37 152.4,166.37 Q2.1
N$8
  Bottom 0.66: JP15.1 132.08,139.7 R29.1 | 138.43,203.2 X3.1
  Bottom 0.813: JP15.1 132.08,152.4 130.18,154.31 130.18,173.99 140.85,173.99 140.97,199.39 138.23,199.39 X3.1
N$9
  Bottom 0.66: Q2.2 149.86,156.21
  Bottom 1.676: 149.86,161.29 133.35,161.29 L1.1 133.35,155.57 137.8,151.13 146.05,151.13 Q3.3 | Q2.2 149.86,161.29 | 149.86,161.29 D1.C
N$10
  Bottom 1.676: C3.1 119.38,153.67 | JP13.1 D2.A 119.38,153.67 | 119.38,153.67 120.65,154.94 L1.2 124.46,157.48 124.46,167.64 Q4.D C6.1
N$11
  Bottom 0.66: 76.84,146.05 IC2.1 76.2,140.97 78.11,140.97 R24.2
  Bottom 0.813: 83.82,136.52 JP12.2
  Bottom 1.27: R24.2 83.82,136.52
N$12
  Bottom 0.813: R1.1 90.17,164.46 U$1.DQ 90.17,171.45 | 90.17,171.45 90.17,178.44 104.14,178.44 | JP6.2 90.17,171.45
  Bottom 1.27: 104.14,178.44 U$2.D2
N$13
  Bottom 1.676: JP13.2 JP15.2 D2.C | JP13.2 121.92,148.59 127,148.59 127,181.61 125.09,181.61 125.09,186.69 127,186.69 129.54,186.06 133.31,186.06 133.35,191.77 134.62,193.04 134.62,198.12 133.23,199.51 X3.2 | JP13.2 121.92,129.54 127,129.54 127,121.92 Q1.2
N$14
  Bottom 0.66: 77.47,148.59 IC2.2 | 91.12,143.83 79.69,143.83 78.74,144.78
  Bottom 0.813: 77.47,148.59 78.74,148.59 78.74,144.78 78.74,144.14 R24.1 | 91.12,143.83 93.34,146.05 109.22,146.05 110.49,147.32 R28.2
N$15
  Bottom 0.66: IC2.3 78.74,151.13 80.01,149.86 80.01,146.05 81.28,144.78 90.17,144.78 93.98,148.59
  Bottom 0.813: R27.1 93.98,148.59 R26.2
N$16
  Bottom 0.813: R17.2 R19.2 R18.1 IC2.6
N$17
  Bottom 0.66: 92.71,157.48 R18.2 91.44,160.97 76.84,160.97 IC2.7
  Bottom 0.813: JP11.1 92.71,157.48
N$18  (via drill 1)
  Top 0.66: v96.52,165.1 v104.14,165.1
  Bottom 0.66: 109.22,160.02 104.14,160.02 v104.14,165.1 | R11.2 81.92,161.93 92.71,161.93 92.71,165.1 v96.52,165.1
  Bottom 0.813: 109.22,160.02 114.3,160.02 114.3,149.86 116.84,147.32 116.84,124.46 Q1.1
N$19  (via drill 1)
  Top 0.813: v93.98,183.51 v75.56,183.51
  Bottom 0.813: U$5.3 59.69,187.32 59.69,183.51 73.66,183.51 | 73.66,183.51 73.66,190.5 76.84,190.5 77.47,191.77 77.47,194.31 54.61,194.31 38.1,194.31 U$6.3 | v75.56,183.51 73.66,183.51
  Bottom 1: R5.2 29.21,125.73 39.37,125.73 39.37,185.42 38.1,186.69 U$6.3
  Bottom 1.27: U$2.D5 96.52,183.51 v93.98,183.51
N$20
  Bottom 0.813: LED3.A 7.62,121.92 16.51,121.92 16.51,118.11 R6.2
N$21
  Bottom 0.813: R7.2 13.97,115.57 LED4.A
N$22
  Bottom 0.813: R27.2 93.98,161.29 JP14.1
N$23
  Bottom 0.66: 77.47,180.34 U$2.D12
  Bottom 0.813: 77.22,183.51 83.82,183.51 U$3.5 83.82,198.75 15.24,198.75 U$4.5 15.24,182.25 26.67,170.81 26.67,162.56 24.13,160.02 24.13,153.67 S6.3
  Bottom 1.27: 77.22,183.51 U$2.D12
N$24
  Bottom 0.813: LED2.A 13.97,128.27 19.05,128.27 R5.1
N$25
  Bottom 0.813: 114.3,119.38 114.3,147.32 113.03,148.59 113.03,156.21 111.76,157.48 107.95,157.48 JP10.1
  Bottom 1.676: Q1.3 114.3,119.38 R12.1
N$26
  Bottom 0.813: 99.06,185.42 92.71,185.42 U$3.2 91.44,202.56 7.62,202.56 U$4.2 7.62,182.88 5.08,180.34 5.08,170.18 6.91,170.18 S1.3
  Bottom 1.27: 99.06,185.42 U$2.D4
N$27
  Bottom 0.66: R4.1 69.85,166.37 R2.2 60.96,166.37 IC1.1 IC1.3
N$28
  Bottom 1.27: U$2.AREF 69.53,178.37 R2.1
N$29
  Bottom 0.66: IC2.5 78.74,156.21 78.74,152.72 80.8,150.81 R14.1
  Bottom 0.813: R14.1 83.82,150.81 C2.+
N$30
  Bottom 0.813: 90.17,180.34 87.63,182.88 87.63,186.69 88.9,187.96 U$3.3 88.9,201.3 10.16,201.3 U$4.3 10.16,182.88 21.67,171.37 S2.3
  Bottom 1.27: 90.17,180.34 U$2.D7
N$31
  Bottom 0.813: S3.3 5.08,152.4 5.08,165.1 25.4,165.1 25.4,170.18 12.7,182.88 U$4.4 12.7,200.02 86.36,200.02 U$3.4 86.36,185.42 86.11,185.42 86.11,181.61
  Bottom 1.27: 86.11,181.61 U$2.D8
N$32
  Bottom 0.813: JP12.1 83.82,140.97 | 83.82,140.97 87.63,140.97 88.9,139.7 90.17,140.97 R21.2 | R39.2 81.28,140.97 83.82,140.97
N$33
  Bottom 0.813: JP10.2 99.06,152.4 97.79,151.13 95.89,151.13 94.77,152.24 93.03,152.24 R14.2
N$34
  Bottom 0.66: IC2.8 67.31,161.29 JP21.1
  Bottom 0.813: R34.1 63.5,161.29 64.77,160.02 JP21.1
N$35
  Bottom 0.813: JP11.2 R20.1
N$36
  Bottom 0.813: IC2.13 R37.1 R36.1
N$37  (via drill 1)
  Top 0.813: v90.17,185.42 v81.28,185.42
  Bottom 0.813: 17.78,187.96 U$4.6 17.78,197.49 81.28,197.49 U$3.6 v81.28,185.42 | S4.3 5.08,137.72 5.08,147.32 29.21,147.32 29.21,153.67 34.29,158.75 | U$2.D6 v90.17,185.42
  Bottom 1: 17.78,187.96 34.29,171.45 34.29,158.75
N$38  (via drill 1)
  Top 0.813: v75.56,186.69 67.31,182.88 67.31,179.07 66.04,179.07 v65.72,176.85
  Bottom 0.813: S5.3 29.13,135.81 35.56,142.24 | 19.68,189.23 U$4.7 20.32,196.21 78.74,196.21 U$3.7 v75.56,186.69 | v65.72,176.85 67.06,178.82
  Bottom 1: 35.56,142.24 35.56,172.08 20.32,187.32 U$4.7
  Bottom 1.27: 67.06,178.82 U$2.SDA
N$39
  Bottom 0.813: R8.2 44.29,180.34 44.29,124.62 45.08,123.19 45.08,119.38 35.56,119.38 LED5.A
N$40
  Bottom 0.813: R9.2 42.55,175.26 43.18,175.26 LED6.A
N$41  (via drill 0.8)
  Top 0.813: v34.92,175.89 v56.52,175.89 | v62.39,179.7 v62.39,184.94
  Bottom 0.813: v56.52,175.89 56.52,179.7 v62.39,179.7 62.87,180.34 | v62.39,184.94 71.12,184.94 U$5.7
  Bottom 1: U$6.7 27.94,184.79 R9.1 v34.92,175.89
  Bottom 1.27: U$2.SCL 62.87,180.34
N$42  (via drill 0.8, 1)
  Top 0.813: v60.96,186.53 v30.48,186.53 | v75.56,192.41 v100.33,192.41
  Bottom 0.813: v60.96,186.53 68.58,186.53 U$5.6 68.58,192.41 v75.56,192.41 | v100.33,192.41 106.68,192.41 JP7.2
  Bottom 1: R8.1 30.48,184.79 v30.48,186.53 U$6.6
  Bottom 1.27: JP7.2 U$2.D1
N$43
  Bottom 0.813: JP19.2 66.04,156.21 IC2.10
N$44
  Bottom 0.813: R32.1 59.69,153.67 JP19.1
N$45
  Bottom 0.813: IC2.12 R38.2 63.5,149.86 60.96,149.86 58.42,152.4 58.42,153.04 56.52,153.04 54.61,151.13 R35.1
N$46
  Bottom 0.813: R35.2 53.98,139.06 54.61,138.43 JP22.2 JP22.1
N$47
  Bottom 0.813: JP23.2 JP23.1 R36.2
N$48
  Bottom 0.813: IC2.14 68.58,144.14 62.23,144.14 62.23,146.05 R38.1 54.61,148.59 52.07,148.59 52.07,154.94 JP24.1 JP24.2
N$49
  Bottom 0.813: IC2.9 69.85,158.75 70.96,160.02 70.96,162.56 69.85,163.83 64.14,163.83 R34.2 62.87,163.83 60.96,163.83 R33.1
N$50
  Bottom 1.676: C6.2 R25.2
N$51  (via drill 1)
  Top 0.813: v106.05,177.8 v123.19,177.8
  Bottom 0.813: R23.2 123.19,180.34 v123.19,177.8 123.19,170.18 | R22.2 92.71,176.53 106.05,176.53 v106.05,177.8
  Bottom 1.676: 123.19,170.18 Q4.G
N$52
  Bottom 1.27: JP7.1 U$2.D0
N$53
  Bottom 0.813: U$2.RESET JP4.1
N$54  (via drill 1)
  Top 0.813: v114.3,187.32 v121.92,187.32
  Bottom 0.813: JP14.2 99.06,173.99 107.95,173.99 114.3,180.34 v114.3,187.32 | v121.92,187.32 123.23,189.27 123.23,198.12 | 123.23,198.12 X3.4 | JP16.1 123.23,198.12
N$55  (via drill 0.8 pad 6.45)
  other vias: 138.27,167.64
N$56  (via drill 0.8 pad 6.45)
  other vias: 149.86,140.02
N$57  (via drill 0.8 pad 6.45)
  other vias: 149.86,132.4
N$58  (via drill 0.8 pad 6.45)
  other vias: 136.84,121.92
N$59  (via drill 0.8 pad 2.54)
  other vias: 120.65,157.48
N$60  (via drill 0.8 pad 2.54)
  other vias: 133.35,157.48
N$61  (via drill 0.8 pad 2.54)
  other vias: 119.38,151.13
N$62  (via drill 0.8 pad 2.54)
  other vias: 129.54,151.13
N$63  (via drill 0.8 pad 3.61)
  other vias: 149.86,162.56
N$64  (via drill 0.8)
  Top 0.813: v41.91,73.5 v58.42,73.5
  Bottom 0.813: 74.68,70.1 72.87,70.64 58.42,70.64 v58.42,73.5 U$11.2 | R40.2 41.28,20.32 40.64,20.32 | 40.8,73.5 40.64,73.66
  Bottom 1: 40.64,20.32 40.64,73.66 | 40.64,73.66 40.8,73.5 | 40.8,73.5 v41.91,73.5 40.8,73.5 | 40.64,73.66 U$12.2
  Bottom 1.27: U$7.D13 74.68,70.1
N$65
  Bottom 0.813: LED7.A 8.89,13.97 8.89,19.05 R40.1
N$66
  Bottom 0.813: R48.2 130.18,72.39 | T2.2 130.18,72.39 | 130.18,72.39 R41.2
N$67
  Bottom 0.813: R42.1 134.62,67.31 T2.3
N$68
  Bottom 0.813: Q7.1 152.4,35.56 134.62,35.56 134.62,40.01 131.44,43.18 131.44,60.96 144.78,60.96 | 144.78,60.96 R43.1 R42.2 | 144.78,60.96 144.78,54.61 152.4,54.61 Q5.1
N$69
  Bottom 0.66: Q5.2 149.86,44.45
  Bottom 1.676: 149.86,49.53 133.35,49.53 L2.1 133.35,43.81 137.8,39.37 146.05,39.37 Q7.3 | Q5.2 149.86,49.53 | 149.86,49.53 D3.C
N$70
  Bottom 1.676: C8.1 119.38,41.91 | JP25.1 D4.A 119.38,41.91 | 119.38,41.91 120.65,43.18 L2.2 124.46,45.72 124.46,55.88 Q8.D C14.1
N$71
  Bottom 0.66: 76.84,34.29 IC3.1 76.2,29.21 78.11,29.21 R45.2
  Bottom 0.813: 83.82,24.77 JP31.2
  Bottom 1.27: R45.2 83.82,24.77
N$72
  Bottom 0.66: 77.47,36.83 IC3.2 | 91.12,32.07 79.69,32.07 78.74,33.02
  Bottom 0.813: 77.47,36.83 78.74,36.83 78.74,33.02 78.74,32.39 R45.1 | 91.12,32.07 93.34,34.29 109.22,34.29 110.49,35.56 R46.2
N$73
  Bottom 1.676: JP25.2 JP26.2 D4.C | JP25.2 121.92,36.83 127,36.83 127,69.85 125.09,69.85 125.09,74.93 127,74.93 129.54,74.3 133.31,74.3 133.35,80.01 134.62,81.28 134.62,86.36 133.23,87.75 X5.2 | JP25.2 121.92,17.78 127,17.78 127,10.16 Q6.2
N$74
  Bottom 0.66: JP26.1 132.08,27.94 R44.1 | 138.43,91.44 X5.1
  Bottom 0.813: JP26.1 132.08,40.64 130.18,42.55 130.18,62.23 140.85,62.23 140.97,87.63 138.23,87.63 X5.1
N$75
  Bottom 0.66: IC3.3 78.74,39.37 80.01,38.1 80.01,34.29 81.28,33.02 90.17,33.02 93.98,36.83
  Bottom 0.813: R51.1 93.98,36.83 R73.2
N$76
  Bottom 0.813: R55.2 R53.2 R52.1 IC3.6
N$77
  Bottom 0.66: 92.71,45.72 R52.2 91.44,49.21 76.84,49.21 IC3.7
  Bottom 0.813: JP39.1 92.71,45.72
N$78
  Bottom 0.813: LED8.A 7.62,10.16 16.51,10.16 16.51,6.35 R57.2
N$79
  Bottom 0.66: 77.47,68.58 U$7.D12
  Bottom 0.813: 77.22,71.76 83.82,71.76 U$10.5 83.82,86.99 15.24,86.99 U$9.5 15.24,70.48 26.67,59.06 26.67,50.8 24.13,48.26 24.13,41.91 S10.3
  Bottom 1.27: 77.22,71.76 U$7.D12
N$80
  Bottom 0.813: LED9.A 13.97,16.51 19.05,16.51 R58.1
N$81  (via drill 1)
  Top 0.813: v93.98,71.76 v75.56,71.76
  Bottom 0.813: U$11.3 59.69,75.56 59.69,71.76 73.66,71.76 | 73.66,71.76 73.66,78.74 76.84,78.74 77.47,80.01 77.47,82.55 54.61,82.55 38.1,82.55 U$12.3 | v75.56,71.76 73.66,71.76
  Bottom 1: R58.2 29.21,13.97 39.37,13.97 39.37,73.66 38.1,74.93 U$12.3
  Bottom 1.27: U$7.D5 96.52,71.76 v93.98,71.76
N$82  (via drill 1)
  Top 0.66: v96.52,53.34 v104.14,53.34
  Bottom 0.66: 109.22,48.26 104.14,48.26 v104.14,53.34 | R56.2 81.92,50.17 92.71,50.17 92.71,53.34 v96.52,53.34
  Bottom 0.813: 109.22,48.26 114.3,48.26 114.3,38.1 116.84,35.56 116.84,12.7 Q6.1
N$83
  Bottom 0.66: R59.1 69.85,54.61 R60.2 60.96,54.61 IC4.1 IC4.3
N$84
  Bottom 1.27: U$7.AREF 69.53,66.61 R60.1
N$85
  Bottom 0.813: R61.2 13.97,3.81 LED10.A
N$86
  Bottom 0.813: 114.3,7.62 114.3,35.56 113.03,36.83 113.03,44.45 111.76,45.72 107.95,45.72 JP32.1
  Bottom 1.676: Q6.3 114.3,7.62 R47.1
N$87
  Bottom 0.66: IC3.5 78.74,44.45 78.74,40.96 80.8,39.05 R62.1
  Bottom 0.813: R62.1 83.82,39.05 C12.+
N$88
  Bottom 0.813: R63.1 90.17,52.7 U$8.DQ 90.17,59.69 | 90.17,59.69 90.17,66.67 104.14,66.67 | JP27.2 90.17,59.69
  Bottom 1.27: 104.14,66.67 U$7.D2
N$89
  Bottom 0.813: 99.06,73.66 92.71,73.66 U$10.2 91.44,90.8 7.62,90.8 U$9.2 7.62,71.12 5.08,68.58 5.08,58.42 6.91,58.42 S7.3
  Bottom 1.27: 99.06,73.66 U$7.D4
N$90
  Bottom 0.813: 90.17,68.58 87.63,71.12 87.63,74.93 88.9,76.2 U$10.3 88.9,89.54 10.16,89.54 U$9.3 10.16,71.12 21.67,59.61 S8.3
  Bottom 1.27: 90.17,68.58 U$7.D7
N$91
  Bottom 0.813: S9.3 5.08,40.64 5.08,53.34 25.4,53.34 25.4,58.42 12.7,71.12 U$9.4 12.7,88.27 86.36,88.27 U$10.4 86.36,73.66 86.11,73.66 86.11,69.85
  Bottom 1.27: 86.11,69.85 U$7.D8
N$92  (via drill 1)
  Top 0.813: v90.17,73.66 v81.28,73.66
  Bottom 0.813: 17.78,76.2 U$9.6 17.78,85.73 81.28,85.73 U$10.6 v81.28,73.66 | S11.3 5.08,25.96 5.08,35.56 29.21,35.56 29.21,41.91 34.29,46.99 | U$7.D6 v90.17,73.66
  Bottom 1: 17.78,76.2 34.29,59.69 34.29,46.99
N$93  (via drill 1)
  Top 0.813: v75.56,74.93 67.31,71.12 67.31,67.31 66.04,67.31 v65.72,65.09
  Bottom 0.813: S12.3 29.13,24.05 35.56,30.48 | 19.68,77.47 U$9.7 20.32,84.45 78.74,84.45 U$10.7 v75.56,74.93 | v65.72,65.09 67.06,67.06
  Bottom 1: 35.56,30.48 35.56,60.33 20.32,75.56 U$9.7
  Bottom 1.27: 67.06,67.06 U$7.SDA
N$94
  Bottom 0.813: R64.2 44.29,68.58 44.29,12.86 45.08,11.43 45.08,7.62 35.56,7.62 LED11.A
N$95
  Bottom 0.813: R65.2 42.55,63.5 43.18,63.5 LED12.A
N$96  (via drill 0.8)
  Top 0.813: v34.92,64.14 v56.52,64.14 | v62.39,67.95 v62.39,73.18
  Bottom 0.813: v56.52,64.14 56.52,67.95 v62.39,67.95 62.87,68.58 | v62.39,73.18 71.12,73.18 U$11.7
  Bottom 1: U$12.7 27.94,73.03 R65.1 v34.92,64.14
  Bottom 1.27: U$7.SCL 62.87,68.58
N$97
  Bottom 0.813: IC3.4 73.66,40.64 C11.1 73.66,27.31 64.77,27.31 64.77,25.4 JP28.2
N$98
  Bottom 0.813: C9.+ 93.98,25.4 93.98,26.67 JP29.1 R50.2 99.06,31.75 99.06,33.02 111.76,33.02 R44.2
N$99
  Bottom 0.813: R51.2 93.98,49.53 JP30.1
N$100
  Bottom 0.813: JP31.1 83.82,29.21 | 83.82,29.21 87.63,29.21 88.9,27.94 90.17,29.21 R49.2 | R78.2 81.28,29.21 83.82,29.21
N$101
  Bottom 0.813: JP32.2 99.06,40.64 97.79,39.37 95.89,39.37 94.77,40.48 93.03,40.48 R62.2
N$102
  Bottom 0.66: IC3.8 67.31,49.53 JP35.1
  Bottom 0.813: R71.1 63.5,49.53 64.77,48.26 JP35.1
N$103
  Bottom 0.813: JP34.2 66.04,44.45 IC3.10
N$104
  Bottom 0.813: R66.1 59.69,41.91 JP34.1
N$105
  Bottom 0.813: IC3.13 R67.1 R69.1
N$106
  Bottom 0.813: IC3.12 R70.2 63.5,38.1 60.96,38.1 58.42,40.64 58.42,41.28 56.52,41.28 54.61,39.37 R68.1
N$107
  Bottom 0.813: R68.2 53.98,27.31 54.61,26.67 JP36.2 JP36.1
N$108
  Bottom 0.813: JP37.2 JP37.1 R69.2
N$109
  Bottom 0.813: IC3.14 68.58,32.39 62.23,32.39 62.23,34.29 R70.1 54.61,36.83 52.07,36.83 52.07,43.18 JP38.1 JP38.2
N$110
  Bottom 0.813: IC3.9 69.85,46.99 70.96,48.26 70.96,50.8 69.85,52.07 64.14,52.07 R71.2 62.87,52.07 60.96,52.07 R72.1
N$111
  Bottom 0.813: JP39.2 R54.1
N$112  (via drill 1)
  Top 0.813: v106.05,66.04 v123.19,66.04
  Bottom 0.813: R74.2 123.19,68.58 v123.19,66.04 123.19,58.42 | R75.2 92.71,64.77 106.05,64.77 v106.05,66.04
  Bottom 1.676: 123.19,58.42 Q8.G
N$113
  Bottom 1.676: C14.2 R76.2
N$114  (via drill 0.8, 1)
  Top 0.813: v60.96,74.77 v30.48,74.77 | v75.56,80.64 v100.33,80.64
  Bottom 0.813: v60.96,74.77 68.58,74.77 U$11.6 68.58,80.64 v75.56,80.64 | v100.33,80.64 106.68,80.64 JP45.2
  Bottom 1: R64.1 30.48,73.03 v30.48,74.77 U$12.6
  Bottom 1.27: JP45.2 U$7.D1
N$115
  Bottom 1.27: JP45.1 U$7.D0
N$116
  Bottom 0.813: U$7.RESET JP46.1
N$117  (via drill 1)
  Top 0.813: v114.3,75.56 v121.92,75.56
  Bottom 0.813: JP30.2 99.06,62.23 107.95,62.23 114.3,68.58 v114.3,75.56 | v121.92,75.56 123.23,77.51 123.23,86.36 | 123.23,86.36 X5.4 | JP48.1 123.23,86.36
N$118  (via drill 0.8 pad 6.45)
  other vias: 138.27,55.88
N$119  (via drill 0.8 pad 6.45)
  other vias: 149.86,28.26
N$120  (via drill 0.8 pad 6.45)
  other vias: 149.86,20.64
N$121  (via drill 0.8 pad 6.45)
  other vias: 136.84,10.16
N$122  (via drill 0.8 pad 2.54)
  other vias: 120.65,45.72
N$123  (via drill 0.8 pad 2.54)
  other vias: 133.35,45.72
N$124  (via drill 0.8 pad 2.54)
  other vias: 119.38,39.37
N$125  (via drill 0.8 pad 2.54)
  other vias: 129.54,39.37
N$126  (via drill 0.8 pad 3.61)
  other vias: 149.86,50.8
PWM_CHARGE1
  Bottom 0.813: R10.1 111.76,195.58 101.6,195.58 97.79,195.58 97.79,189.23 101.6,189.23
  Bottom 1.27: 101.6,189.23 U$2.D3
PWM_CHARGE2
  Bottom 0.813: U$2.D11 80.01,180.09
  Bottom 1.27: 80.01,180.09 R22.1
PWM_CHARGE3
  Bottom 0.813: R41.1 111.76,83.82 101.6,83.82 97.79,83.82 97.79,77.47 101.6,77.47
  Bottom 1.27: 101.6,77.47 U$7.D3
PWM_CHARGE4
  Bottom 0.813: U$7.D11 80.01,68.33
  Bottom 1.27: 80.01,68.33 R75.1
PWM_DISCHARGE1  (via drill 0.8)
  Top 0.813: v36.83,183.83 v53.34,183.83
  Bottom 0.66: 82.55,180.34 U$2.D10 | U$5.4 63.5,191.77 54.61,191.77 53.34,190.5 v53.34,183.83 53.34,172.4 80.65,172.4 81.28,173.36 R11.1
  Bottom 1: U$6.4 35.56,183.83 v36.83,183.83 37.78,183.83 38.1,184.15 38.1,127 26.67,127 26.67,118.11 R6.1
  Bottom 1.27: R11.1 81.92,179.07 82.55,180.34
PWM_DISCHARGE2  (via drill 0.8)
  Top 0.813: v36.19,182.25 v52.07,182.25
  Bottom 0.66: U$5.5 66.04,193.04 54.61,193.04 52.07,190.5 v52.07,182.25 52.07,171.45 82.55,171.45 84.93,173.99 84.77,174.31
  Bottom 1: U$6.5 33.02,184.15 34.92,182.25 v36.19,182.25 36.83,181.61 36.83,128.27 24.13,128.27 24.13,115.57 R7.1
  Bottom 1.27: 84.77,174.31 U$2.D9
PWM_DISCHARGE3  (via drill 0.8)
  Top 0.813: v36.83,72.07 v53.34,72.07
  Bottom 0.66: 82.55,68.58 U$7.D10 | U$11.4 63.5,80.01 54.61,80.01 53.34,78.74 v53.34,72.07 53.34,60.64 80.65,60.64 81.28,61.59 R56.1
  Bottom 1: U$12.4 35.56,72.07 v36.83,72.07 37.78,72.07 38.1,72.39 38.1,15.24 26.67,15.24 26.67,6.35 R57.1
  Bottom 1.27: R56.1 81.92,67.31 82.55,68.58
PWM_DISCHARGE4  (via drill 0.8)
  Top 0.813: v36.19,70.48 v52.07,70.48
  Bottom 0.66: U$11.5 66.04,81.28 54.61,81.28 52.07,78.74 v52.07,70.48 52.07,59.69 82.55,59.69 84.93,62.23 84.77,62.55
  Bottom 1: U$12.5 33.02,72.39 34.92,70.48 v36.19,70.48 36.83,69.85 36.83,16.51 24.13,16.51 24.13,3.81 R61.1
  Bottom 1.27: 84.77,62.55 U$7.D9
S$1
  Top 2: 20,110.76 -1,110.76 -1,131.76
S$2
  Top 2: 140,110.76 161,110.76 161,131.76
S$3
  Top 2: 20,212.76 -1,212.76 -1,191.76
S$4
  Top 2: 161,191.76 161,212.76 140,212.76
S$5
  Bottom 2: 20,110.76 -1,110.76 -1,131.76
S$6
  Bottom 2: 140,110.76 161,110.76 161,131.76
S$7
  Bottom 2: 20,212.76 -1,212.76 -1,191.76
S$8
  Bottom 2: 161,191.76 161,212.76 140,212.76
S$9
  Top 2: 20,-1 -1,-1 -1,20
S$10
  Top 2: 140,-1 161,-1 161,20
S$11
  Top 2: 20,101 -1,101 -1,80
S$12
  Top 2: 161,80 161,101 140,101
S$13
  Bottom 2: 20,-1 -1,-1 -1,20
S$14
  Bottom 2: 140,-1 161,-1 161,20
S$15
  Bottom 2: 20,101 -1,101 -1,80
S$16
  Bottom 2: 161,80 161,101 140,101
U_BATT1
  Bottom 1.27: U$2.A0 JP18.2
U_BATT2
  Bottom 1.27: U$2.A3 JP5.1
U_BATT3
  Bottom 1.27: U$7.A0 JP29.2
U_BATT4
  Bottom 1.27: U$7.A3 JP44.1
VCC  (via drill 0.8)
  Top 0.813: v68.58,127 v84.45,127
  Bottom 0.66: 94.62,122.55 101.6,116.84 144.78,116.84 154.94,127 154.94,153.67 153.67,153.67
  Bottom 0.813: JP8.1 63.5,133.35 64.77,133.35 68.58,133.35 v68.58,127 68.58,125.73 71.12,125.73 72.39,124.46 72.39,121.92 JP20.2 | v84.45,127 84.45,122.55 94.62,122.55
  Bottom 1.27: JP9.1 64.77,128.27 64.77,133.35
  Bottom 1.676: 154.94,175.26 R16.2 151.13,177.8 X2.1 | 154.94,175.26 154.94,154.94 153.67,153.67 149.86,153.67 | Q2.3 147.32,153.67 149.86,153.67 | Q3.2 149.86,153.67 | C5.+ 154.94,175.26
VCC1  (via drill 0.8)
  Top 0.813: v68.58,15.24 v84.45,15.24
  Bottom 0.66: 94.62,10.8 101.6,5.08 144.78,5.08 154.94,15.24 154.94,41.91 153.67,41.91
  Bottom 0.813: JP28.1 63.5,21.59 64.77,21.59 68.58,21.59 v68.58,15.24 68.58,13.97 71.12,13.97 72.39,12.7 72.39,10.16 JP33.2 | v84.45,15.24 84.45,10.8 94.62,10.8
  Bottom 1.27: JP43.1 64.77,16.51 64.77,21.59
  Bottom 1.676: 154.94,63.5 R43.2 151.13,66.04 X6.1 | 154.94,63.5 154.94,43.18 153.67,41.91 149.86,41.91 | Q5.3 147.32,41.91 149.86,41.91 | Q7.2 149.86,41.91 | C13.+ 154.94,63.5
VIN  (via drill 1.3)
  Top 1.27: v66.67,128.91 v88.9,128.91
  Bottom 1.27: X1.1 63.5,118.11 63.5,123.19 | 63.5,123.19 66.67,123.19 v66.67,128.91 | v88.9,128.91 91.44,128.91 U$2.VIN | 63.5,123.19 60.96,123.19 JP9.2 58.42,125.73 JP1.3 JP1.2 JP1.1
VIN1  (via drill 1.3)
  Top 1.27: v66.67,17.14 v88.9,17.14
  Bottom 1.27: X4.1 63.5,6.35 63.5,11.43 | 63.5,11.43 66.67,11.43 v66.67,17.14 | v88.9,17.14 91.44,17.14 U$7.VIN | 63.5,11.43 60.96,11.43 JP43.2 58.42,13.97 JP41.3 JP41.2 JP41.1

## Text on the board
Bottom: v1 | ChargerShieldExpA | v1 | v1 | ChargerShieldExpA | v1